# Altium PCB STM32G070_prototype.PcbDoc
Units mm, origin at the board's own origin, x right, y up, seen from the top; angles counter-clockwise.
Board outline 60 x 40 mm, 2 copper layers (Top Layer, Bottom Layer), stack 1.035 mm thick; 91 components, 80 nets, 260 pads, 87 vias.
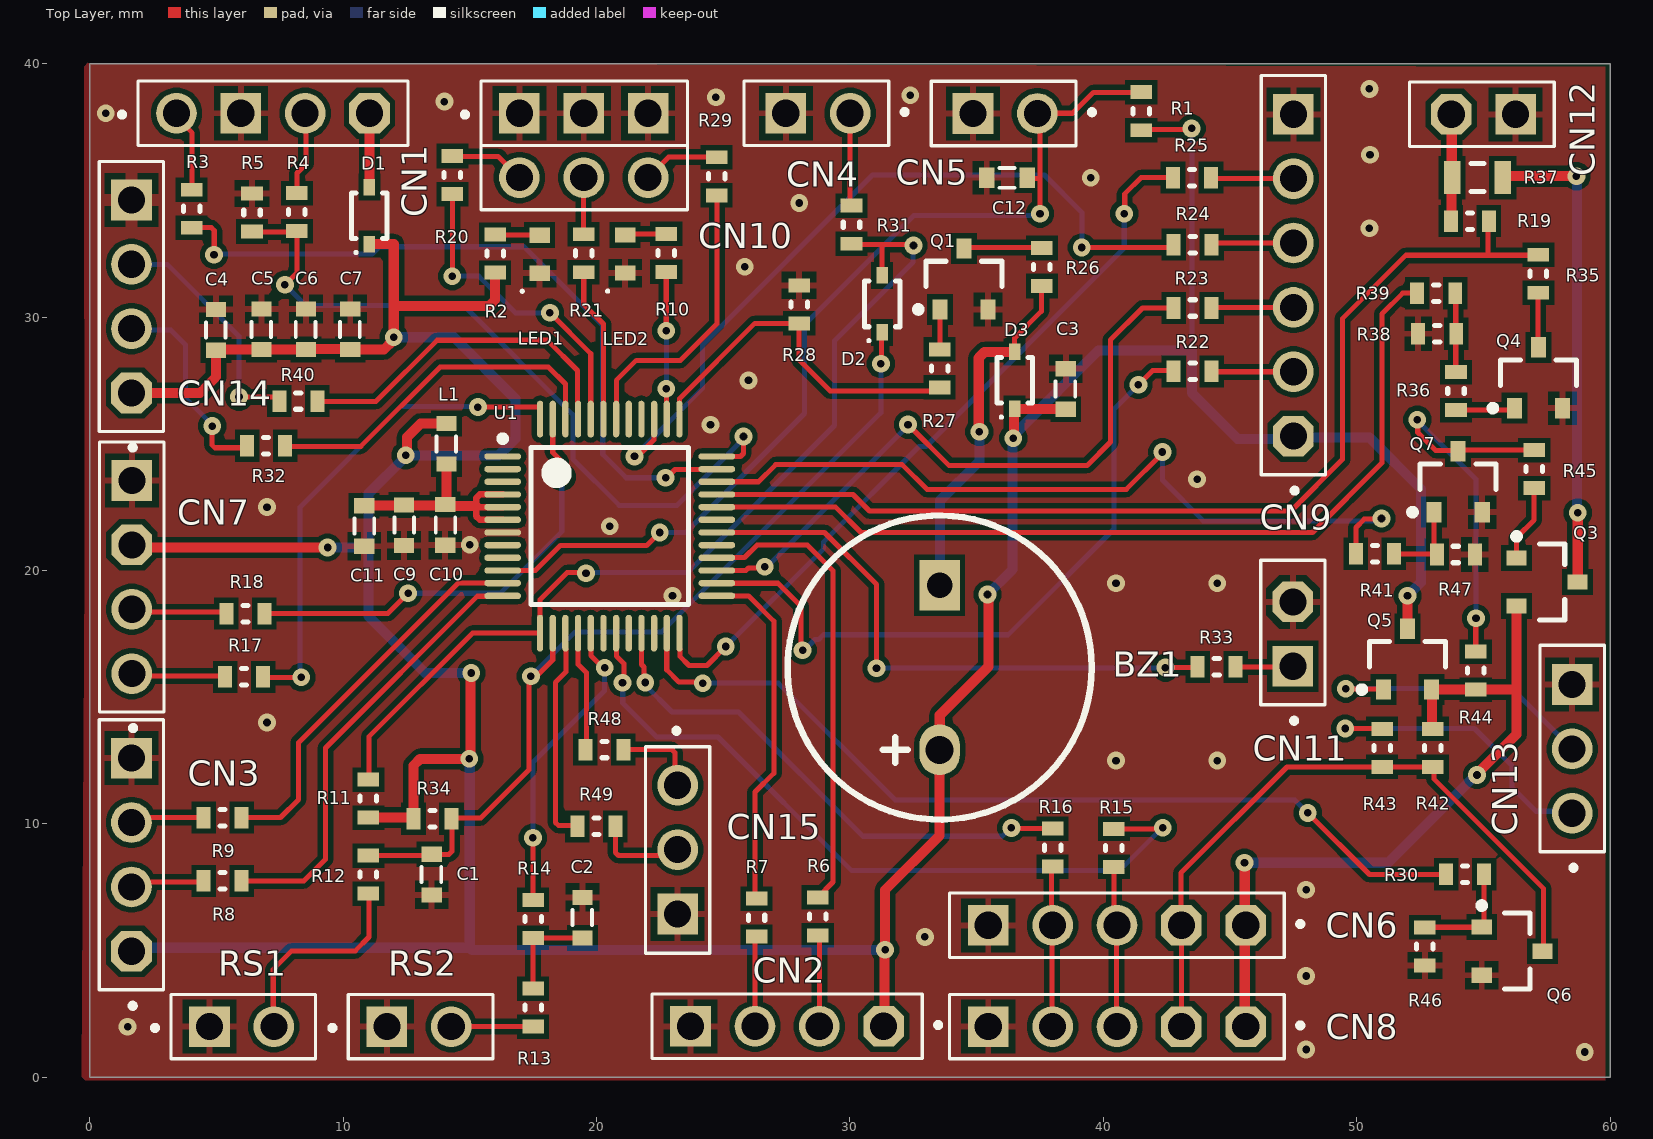
[diagram p0: Top Layer view]
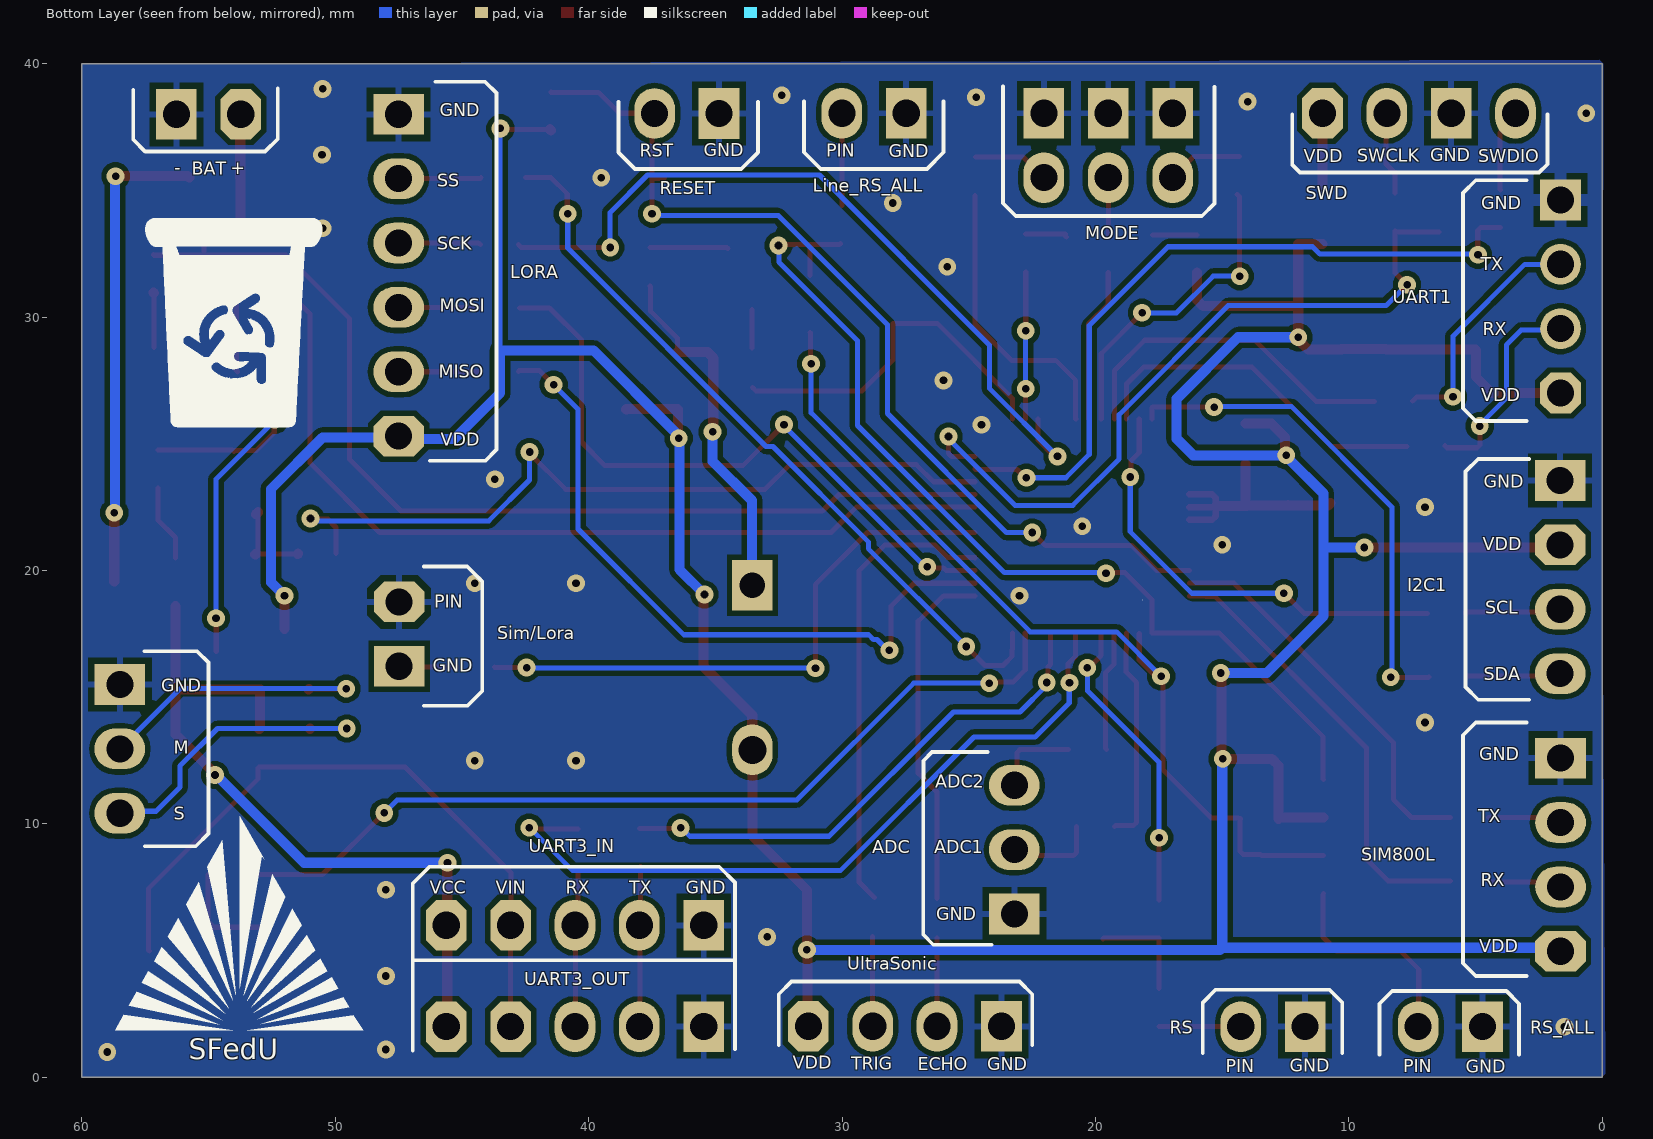
[diagram p1: Bottom Layer view, seen from below]

## Layer stack, top to bottom
Top Solder: solder mask 0.0102, Solder Resist, Dk 3.5
Top Layer: signal copper 0.0175
Dielectric 1: dielectric 1, FR-4, Dk 4.8
Bottom Layer: signal copper 0.0175
Bottom Solder: solder mask 0.0102, Solder Resist, Dk 3.5

## Board outline
0,0 0,40 60,40 60,0

## Design rules (kind name [scope] priority, off if disabled: settings)
Clearance [All] p1: gap=0.2 ignorepadtopadclearanceinfootprint=FALSE except(0: Arc-Hole Track-Hole SMDPad-Hole THPad-Hole Via-Hole Fill-Hole Poly-Hole Region-Hole Text-Hole)
ComponentClearance [All] p1: gap=0.5 collisioncheckmode=3 verticalgap=0.5 showdistances=FALSE
HoleSize [All] p1: absolutevalues=TRUE maxlimit=2.54 minlimit=0.3 maxpercent=80.000 minpercent=20.000
MinimumSolderMaskSliver [All] p1: minsoldermaskwidth=0.15
PolygonConnect PolygonConnect_BIG [IsPad And ( (AsMM(PadXSize_AllLayers)>1) Or (AsMM(PadYSize_AllLayers)>1) )] p1: connectstyle=Relief reliefconductorwidth=0.5 reliefentries=4 polygonreliefangle="90 Angle" airgapwidth=0.254
PolygonConnect PolygonConnect_VIA [IsVia] p2: connectstyle=Direct reliefconductorwidth=0.254 reliefentries=4 polygonreliefangle="90 Angle" airgapwidth=0.254
PolygonConnect [All] p3: connectstyle=Relief reliefconductorwidth=0.254 reliefentries=4 polygonreliefangle="90 Angle" airgapwidth=0.254
RoutingVias [All] p1: holewidth=0.3 width=0.7 viastyle="Through Hole" minholewidth=0.3 minwidth=0.7 maxholewidth=0.3 maxwidth=0.7
SilkToSolderMaskClearance [IsPad] p1: minsilkscreentomaskgap=0.1 clearancetoexposedcopper=TRUE
SolderMaskExpansion SolderMaskExpansion_VIA [IsVia] p1: expansion=0.102 istentingtop=TRUE
SolderMaskExpansion [All] p2: expansion=0.05 istentingtop=FALSE
UnRoutedNet [All] p1: checkbadconnections=TRUE
Width [All] p1: maxlimit=1 minlimit=0.2 preferedwidth=0.2 minimp=50.000000 maximp=50.000000 favimp=50.000000
25 further rules are at their usual default settings.

## Components (designator, comment, footprint, x,y, rotation, side; value= is the part's Value field where it differs from the comment)
BZ1 "BUZZER" BUZZER 33.542,16.17 r90 top
C1 "Capacitor" Cap_0603 13.5,8 r270 top
C2 "Capacitor" Cap_0603 19.45,6.3 r270 top
C3 "Capacitor" Cap_0603 38.519,27.161 r270 top
C4 "" Cap_0603 4.989,29.493 r270 top
C5 "Capacitor" Cap_0603 6.787,29.516 r270 top
C6 "Capacitor" Cap_0603 8.537,29.516 r270 top
C7 "Capacitor" Cap_0603 10.287,29.516 r270 top
C9 "Capacitor" Cap_0603 12.404,21.786 r90 top
C10 "Capacitor" Cap_0603 14.032,21.799 r90 top
C11 "Capacitor" Cap_0603 10.833,21.757 r90 top
C12 "Capacitor" Cap_0603 36.2,35.5 r0 top
CN1 "SWD" PIN_2.54_4_array#1 7.237,38.04 r0 top
CN2 "UltraSonic" PIN_2.54_4_array#2 27.523,2.015 r180 top
CN3 "SIM800L" PIN_2.54_4_array#2 1.651,8.784 r90 top
CN4 "Line_RS_ALL" PIN_2.54_2_ARRAY#1 28.741,38.041 r180 top
CN5 "RESET" PIN_2.54_2_ARRAY#1 36.129,38.033 r180 top
CN6 "UART3_IN" Pin_2.54_5_Array 40.54,6 r180 top
CN7 "I2C1" PIN_2.54_4_array#3 1.666,19.741 r90 top
CN8 "UART3_OUT" Pin_2.54_5_Array 40.54,2 r180 top
CN9 "LORA" Pin_2.54_6_Array 47.5,31.65 r90 top
CN10 "MODE" Pin_2.54_3x2_Array 19.5,36.77 r0 top
CN11 "Sim/Lora" PIN_2.54_2_ARRAY#2 47.479,17.492 r90 top
CN12 "BAT" PIN_2.54_2_ARRAY#2 55,38 r180 top
CN13 "PIN_ARRAY_3" Pin_2.54_3_Array 58.5,12.96 r90 top
CN14 "UART1" PIN_2.54_4_array#4 1.651,30.811 r90 top
CN15 "ADC" Pin_2.54_3_Array 23.204,8.985 r270 top
D1 "D_SCHOTTKY" Diod_Shottky 11.04,34 r90 top
D2 "D_SCHOTTKY" Diod_Shottky 31.275,30.517 r90 top
D3 "D_SCHOTTKY" Diod_Shottky 36.5,27.5 r90 top
L1 "450 mA" Res_0603#1 14.084,24.998 r270 top
LED1 "LED" Led_0603_Red 17.759,32.48 r90 top
LED2 "LED" Led_0603_Red 21.131,32.482 r90 top
Q1 "MOS_N" SOT23-3 34.5,31.5 r90 top
Q3 "MOS_P" SOT23-3 57.506,19.544 r0 top
Q4 "MOS_N" SOT23-3 57.169,27.606 r90 top
Q5 "MOS_P" SOT23-3 52,16.5 r90 top
Q6 "MOS_N" SOT23-3 56.131,4.978 r0 top
Q7 "MOS_N" SOT23-3 54,23.5 r90 top
R1 "10 k" Res_0603#2 41.494,38.121 r270 top
R2 "300 Om" RES_0603 16,32.5 r90 top
R3 "100 Om" RES_0603 4.024,34.273 r270 top
R4 "100 Om" RES_0603 8.182,34.141 r270 top
R5 "100 Om" Res_0603#2 6.409,34.126 r270 top
R6 "100 Om" Res_0603#2 28.729,6.35 r270 top
R7 "100 Om" Res_0603#2 26.316,6.3 r270 top
R8 "100 Om" Res_0603#2 5.25,7.75 r180 top
R9 "100 Om" Res_0603#2 5.25,10.25 r180 top
R10 "300 Om" RES_0603 22.755,32.533 r90 top
R11 "100 k" RES_0603 11,11 r90 top
R12 "300 Om" RES_0603 11,8 r270 top
R13 "300 Om" RES_0603 17.5,2.75 r270 top
R14 "300 Om" RES_0603 17.5,6.25 r90 top
R15 "100 Om" RES_0603 40.416,9.055 r270 top
R16 "100 Om" RES_0603 38,9.061 r270 top
R17 "100 Om" RES_0603 6.1,15.8 r180 top
R18 "100 Om" RES_0603 6.15,18.3 r180 top
R19 "10 k" RES_0603 54.465,33.786 r180 top
R20 "100 Om" RES_0603 14.316,35.603 r270 top
R21 "100 Om" RES_0603 19.493,32.516 r270 top
R22 "100 Om" RES_0603 43.526,27.857 r0 top
R23 "100 Om" RES_0603 43.526,30.357 r0 top
R24 "100 Om" RES_0603 43.526,32.857 r0 top
R25 "100 Om" RES_0603 43.5,35.5 r0 top
R26 "100 Om" RES_0603 37.577,31.975 r90 top
R27 "300 Om" RES_0603 33.539,27.972 r90 top
R28 "51 k" RES_0603 28,30.5 r270 top
R29 "100 Om" RES_0603 24.74,35.554 r270 top
R30 "100 Om" RES_0603 54.274,8.012 r0 top
R31 "100 Om" RES_0603 30.063,33.643 r90 top
R32 "100 Om" RES_0603 6.967,24.922 r180 top
R33 "100 Om" RES_0603 44.474,16.197 r0 top
R34 "50 k" RES_0603 13.53,10.204 r180 top
R35 "10 k" RES_0603 57.167,31.707 r90 top
R36 "300 Om" RES_0603 53.915,27.078 r270 top
R37 "1 Om" Res_0805 54.762,35.501 r0 top
R38 "10 k" RES_0603 53.175,29.339 r0 top
R39 "100 Om" RES_0603 53.135,30.941 r180 top
R40 "100 Om" RES_0603 8.236,26.686 r180 top
R41 "100 Om" RES_0603 50.716,20.662 r180 top
R42 "10 k" RES_0603 53,13 r270 top
R43 "1 k" RES_0603 51,13 r270 top
R44 "10 k" RES_0603 54.696,16.049 r90 top
R45 "1 k" RES_0603 57,24 r90 top
R46 "10 k" RES_0603 52.69,5.166 r90 top
R47 "10 k" RES_0603 53.908,20.63 r0 top
R48 "100 Om" RES_0603 20.315,12.934 r0 top
R49 "100 Om" RES_0603 20,9.9 r0 top
RS1 "RS_ALL" PIN_2.54_2_ARRAY#3 6,2 r0 top
RS2 "RS" PIN_2.54_2_ARRAY#3 13,2 r0 top
U1 "STM32G070" LQFP48 20.525,21.75 r0 top locked

## Footprints (in the part's own frame and the unit in brackets; to place one, negate y for a bottom-side part, rotate by r counter-clockwise, add the part's x,y. Pads: shape width x height; smd on the part's side, far side on the other; paste and mask are expansions set on the pad)
BUZZER [mm]
  oval 2x1.6 hole 1.1: 1(-3.25,0)
  rect 2x1.6 hole 1: 2(3.25,0)
  silkscreen extent -6,-6 6,6, body extent -6,-6 6,6, height 8.5
Cap_0603 [mm] "Chip Capacitor, 2-Leads, Body 1,60x0,80mm, IPC Medium Density"
  rect 0.6x0.8 smd: 1(-0.8,0) 2(0.8,0)
  silkscreen extent -0.3,-0.4 0.3,0.38, body extent -0.8,-0.4 0.8,0.4, height 0.5
Diod_Shottky [mm] "SODFL, 2-Leads, Body 1,25x2,50mm, IPC Medium Density"
  rect 0.65x0.45 smd: 1(-1.125,0) 2(1.125,0)
  silkscreen extent -1.5,-0.7 0.9,0.7, body extent -1.25,-0.67 1.25,0.67, height 1.1
Led_0603_Red [mm]
  rect 0.6x0.8 smd: 1(-0.75,0) 2(0.75,0)
  silkscreen extent -1.51,0.64 -1.41,0.74, body extent -0.85,-0.45 0.85,0.45, height 0.55
LQFP48 [mm] "TSQFP, 48-Leads, Body 7,00x7,00mm, Pitch 0,50mm, IPC Medium Density"
  oval 1.45x0.25 smd: 1(-4.225,2.75) 2(-4.225,2.25) 3(-4.225,1.75) 4(-4.225,1.25) 5(-4.225,0.75) 6(-4.225,0.25) 7(-4.225,-0.25) 8(-4.225,-0.75) 9(-4.225,-1.25) 10(-4.225,-1.75) 11(-4.225,-2.25) 12(-4.225,-2.75) 25(4.225,-2.75) 26(4.225,-2.25) 27(4.225,-1.75) 28(4.225,-1.25) 29(4.225,-0.75) 30(4.225,-0.25) 31(4.225,0.25) 32(4.225,0.75) 33(4.225,1.25) 34(4.225,1.75) 35(4.225,2.25) 36(4.225,2.75)
  oval 0.25x1.45 smd: 13(-2.75,-4.225) 14(-2.25,-4.225) 15(-1.75,-4.225) 16(-1.25,-4.225) 17(-0.75,-4.225) 18(-0.25,-4.225) 19(0.25,-4.225) 20(0.75,-4.225) 21(1.25,-4.225) 22(1.75,-4.225) 23(2.25,-4.225) 24(2.75,-4.225) 37(2.75,4.225) 38(2.25,4.225) 39(1.75,4.225) 40(1.25,4.225) 41(0.75,4.225) 42(0.25,4.225) 43(-0.25,4.225) 44(-0.75,4.225) 45(-1.25,4.225) 46(-1.75,4.225) 47(-2.25,4.225) 48(-2.75,4.225)
  silkscreen extent -4.35,-3.1 3.1,3.57, body extent -4.5,-4.5 4.5,4.5, height 1.6
PIN_2.54_2_ARRAY#1 [mm]
  round 1.605 / inner round 1.605 / far side oval 1.605x2 hole 1.07: 1(-1.27,0)
  rect 1.605x1.605 / inner rect 1.605x1.605 / far side rect 1.605x2 hole 1.07: 2(1.27,0)
  silkscreen extent -3.52,-1.27 2.92,1.27, body extent -2.56,-1.22 2.52,1.32, height 9.5
PIN_2.54_2_ARRAY#2 [mm]
  rect 1.605x1.605 / inner rect 1.605x1.605 / far side rect 1.605x2 hole 1.07: 1(-1.27,0)
  oct 1.605x1.605 / inner oct 1.605x1.605 / far side oct 1.605x2 hole 1.07: 2(1.27,0)
  silkscreen extent -3.52,-1.27 2.92,1.27, body extent -2.56,-1.22 2.52,1.32, height 9.5
PIN_2.54_2_ARRAY#3 [mm]
  rect 1.605x1.605 / inner rect 1.605x1.605 / far side rect 1.605x2 hole 1.07: 1(-1.27,0)
  round 1.605 / inner round 1.605 / far side oval 1.605x2 hole 1.07: 2(1.27,0)
  silkscreen extent -3.52,-1.27 2.92,1.27, body extent -2.56,-1.22 2.52,1.32, height 9.5
Pin_2.54_3_Array [mm]
  round 1.605 / inner round 1.605 / far side oval 1.605x2 hole 1.07: 1(-2.54,0) 2(0,0)
  rect 1.605x1.605 / inner rect 1.605x1.605 / far side rect 1.605x2 hole 1.07: 3(2.54,0)
  silkscreen extent -4.79,-1.27 4.09,1.27, body extent -3.81,-1.27 3.81,1.27, height 9.5
Pin_2.54_3x2_Array [mm]
  rect 1.605x1.605 / inner rect 1.605x1.605 / far side rect 1.605x2 hole 1.07: 1(-2.54,1.27) 2(0,1.27) 3(2.54,1.27)
  round 1.605 / inner round 1.605 / far side oval 1.605x2 hole 1.07: 4(-2.54,-1.27) 5(0,-1.27) 6(2.54,-1.27)
  silkscreen extent -4.79,-2.54 4.09,2.54, body extent -3.81,-2.55 3.81,2.54, height 9.5
PIN_2.54_4_array#1 [mm]
  round 1.605 / inner round 1.605 / far side oval 1.605x2 hole 1.07: 1(-3.81,0) 3(1.27,0)
  rect 1.605x1.605 / inner rect 1.605x1.605 / far side rect 1.605x2 hole 1.07: 2(-1.27,0)
  oct 1.605x1.605 / inner oct 1.605x1.605 / far side oct 1.605x2 hole 1.07: 4(3.81,0)
  silkscreen extent -6.06,-1.27 5.33,1.27, body extent -5.08,-1.27 5.08,1.27, height 9.5
PIN_2.54_4_array#2 [mm]
  oct 1.605x1.605 / inner oct 1.605x1.605 / far side oct 1.605x2 hole 1.07: 1(-3.81,0)
  round 1.605 / inner round 1.605 / far side oval 1.605x2 hole 1.07: 2(-1.27,0) 3(1.27,0)
  rect 1.605x1.605 / inner rect 1.605x1.605 / far side rect 1.605x2 hole 1.07: 4(3.81,0)
  silkscreen extent -6.06,-1.27 5.33,1.27, body extent -5.08,-1.27 5.08,1.27, height 9.5
PIN_2.54_4_array#3 [mm]
  round 1.605 / inner round 1.605 / far side oval 1.605x2 hole 1.07: 1(-3.81,0) 2(-1.27,0)
  oct 1.605x1.605 / inner oct 1.605x1.605 / far side oct 1.605x2 hole 1.07: 3(1.27,0)
  rect 1.605x1.605 / inner rect 1.605x1.605 / far side rect 1.605x2 hole 1.07: 4(3.81,0)
  silkscreen extent -6.06,-1.27 5.33,1.27, body extent -5.08,-1.27 5.08,1.27, height 9.5
PIN_2.54_4_array#4 [mm]
  oct 1.605x1.605 hole 1.07: 1(-3.81,0)
  round 1.605 hole 1.07: 2(-1.27,0) 3(1.27,0)
  rect 1.605x1.605 hole 1.07: 4(3.81,0)
  silkscreen extent -6.06,-1.27 5.33,1.27, body extent -5.08,-1.27 5.08,1.27, height 9.5
Pin_2.54_5_Array [mm]
  oct 1.605x1.605 / inner oct 1.605x1.605 / far side oct 1.605x2 hole 1.07: 1(-5.08,0) 2(-2.54,0)
  round 1.605 / inner round 1.605 / far side oval 1.605x2 hole 1.07: 3(0,0) 4(2.54,0)
  rect 1.605x1.605 / inner rect 1.605x1.605 / far side rect 1.605x2 hole 1.07: 5(5.08,0)
  silkscreen extent -7.33,-1.27 6.61,1.27, body extent -6.35,-1.27 6.35,1.27, height 9.5
Pin_2.54_6_Array [mm]
  oct 1.605x1.605 / inner oct 1.605x1.605 / far side oct 1.605x2 hole 1.07: 1(-6.35,0)
  round 1.605 / inner round 1.605 / far side oval 1.605x2 hole 1.07: 2(-3.81,0) 3(-1.27,0) 4(1.27,0) 5(3.81,0)
  rect 1.605x1.605 / inner rect 1.605x1.605 / far side rect 1.605x2 hole 1.07: 6(6.35,0)
  silkscreen extent -8.6,-1.27 7.88,1.27, body extent -7.62,-1.27 7.62,1.27, height 9.5
Res_0603#1 [mm] "Chip Resistor, 2-Leads, Body 1,60x0,80mm, IPC Medium Density"
  rect 0.6x0.8 smd: 1(-0.8,0) 2(0.8,0)
  silkscreen extent -0.3,-0.4 0.3,0.38, body extent -0.8,-0.4 0.8,0.4, height 0.5
Res_0603#2 [mm] "Chip Resistor, 2-Leads, Body 1,60x0,80mm, IPC Medium Density"
  rect 0.55x0.85 smd: 1(-0.75,0) 2(0.75,0)
  silkscreen extent -0.1,-0.33 0.1,0.33, body extent -0.8,-0.4 0.8,0.4, height 0.45
RES_0603 [mm] "Chip Resistor, 2-Leads, Body 1,60x0,80mm, IPC Medium Density"
  rect 0.55x0.85 smd: 1(-0.75,0) 2(0.75,0)
  silkscreen extent -0.1,-0.33 0.1,0.33, body extent -0.8,-0.4 0.8,0.4, height 0.45
Res_0805 [mm] "Chip Resistor, 2-Leads, Body 2,00x1,25mm, IPC Medium Density"
  rect 0.65x1.3 smd: 1(-1,0) 2(1,0)
  silkscreen extent -0.25,-0.55 0.25,0.55, body extent -1,-0.63 1,0.63, height 0.5
SOT23-3 [mm] "SOT23, 3-Leads, Body 2,92x2,37mm, Pitch 0,95mm, IPC Medium Density"
  rect 0.8x0.6 smd: 1(-1.2,0.95) 2(-1.2,-0.95) 3(1.2,0)
  silkscreen extent -1.32,-1.5 0.7,1.92, body extent -1.32,-1.52 1.32,1.52, height 1.11

## Part data
C1 C2 C3 C5 C6 C7 C9 C10 C11 C12: Voltage=16v
  C1 C2 C3 C6 C7 C11 C12: Сapacity=0.1u
  C5 C9: Сapacity=4.7u
  C10: Сapacity=10u
C4: library part Capacitor, Voltage=16v, Сapacity=10u
CN1 CN2 CN3 CN7 CN14: library part PIN_ARRAY_4
CN4 CN5 CN11 CN12: library part PIN_ARRAY_2
CN6 CN8: library part PIN_ARRAY_5
CN9: library part PIN_ARRAY_6
CN10: library part PIN_ARRAY_3x2
CN15: library part PIN_ARRAY_3
D1 D2 D3: library part Diod_Shottky, Voltage=20v
L1: library part Filter, "BLM18BB221SN1D"
R1 R2 R3 R4 R5 R6 R7 R8 R9 R10 R11 R12 R13 R14 R15 R16 R17 R18 R19 R20 R21 R22 R23 R24 R25 R26 R27 R28 R29 R30 R31 R32 R33 R34 R35 R36 R37 R38 R39 R40 R41 R42 R43 R44 R45 R46 R47 R48 R49: library part Resistor
RS1 RS2: library part Reed_Switch

## Via types
v1: diameter 0.7, hole 0.3, Top Layer to Bottom Layer, tented both sides, 87 vias

## Nets (pads, with @x,y where several pads share a name; then routed paths per layer and width w, separated by ;. In a path a pad name is that pad's centre, name@x,y a point inside that pad or via, vN(x,y) a via of type N, cw(c..) or ccw(c..) an arc to the next point about the centre after c; other vN are vias at no path point)
+3v: CN12.2 R19.2 R37.1 | length 4.5
  Top Layer w0.4: CN12.2@53.54,37.81 CN12.2 53.746,37.984 53.746,35.517 R37.1 53.739,35.478 53.739,33.81 R19.2
ADC1: R49.1 U1.15 | length 8.6
  Top Layer w0.2: U1.15 18.785,17.515 18.785,16.88 18.794,16.871 18.794,15.997 18.377,15.581 18.377,10.059 18.495,9.942 19.208,9.942 R49.1
ADC2: R48.1 U1.16 | length 4.7
  Top Layer w0.2: U1.16 19.28,17.52 19.28,16.292 19.601,15.971 19.601,12.97 R48.1
BAT_LEVEL: R19.1 R35.2 U1.33 | length 41.5
  Top Layer w0.2: U1.33@24.756,22.994 30.126,22.994 30.769,22.35 47.406,22.35 49.431,24.375 49.431,29.931 51.937,32.437 54.956,32.437 ; 54.956,32.435 54.956,32.437 ; R19.1 55.173,33.745 55.173,32.437 ; R35.2 57.146,32.437 55.173,32.437 ; 54.956,32.437 55.173,32.437
BUZZER: R27.1 R28.2 U1.37 | length 14.3
  Top Layer w0.2: U1.37@23.276,25.976 23.276,26.776 26.25,29.75 R28.2 28,28.301 29.214,27.087 33.404,27.087 R27.1
CALIB: R14.2 U1.17 | length 12
  Top Layer w0.2: v1(17.493,9.452) 17.493,7.007 R14.2 ; U1.17 19.785,17.515 19.785,16.638 20.259,16.163 v1(20.327,16.163)
  Bottom Layer w0.2: v1(17.493,9.452) 17.493,12.433 20.314,15.255 20.314,16.15 v1(20.327,16.163)
COMMON_LINE: D2.2 R11.2 R31.1 U1.13 | length 38
  Top Layer w0.2: R11.2 11.02,11.77 11.02,13.44 15.106,17.525 U1.13 ; U1.13 17.774,18.849 18.839,19.914 19.569,19.914 v1(19.588,19.895) ; R31.1 30.1,32.856 31.275,32.856 ; D2.2 31.275,32.856 ; v1(32.511,32.824) 32.48,32.856 31.275,32.856
  Bottom Layer w0.2: v1(19.588,19.895) 19.608,19.914 23.588,19.914 29.392,25.718 29.392,29.069 32.497,32.174 32.497,32.81 v1(32.511,32.824)
Door: C1.1 D2.1 R12.1 R34.1 U1.14 | length 35.7
  Top Layer w0.2: R12.1 13.45,8.75 C1.1 14.186,8.8 14.303,8.917 R34.1@14.303,10.181 ; R34.1 R34.1@14.303,10.181 ; U1.14@18.275,17.51 18.275,16.467 17.731,15.924 17.51,15.924 17.336,15.75 17.336,12.132 15.442,10.238 14.359,10.238 R34.1@14.303,10.181 ; v1(31.223,28.158) 31.249,28.183 31.249,29.367 D2.1
  Bottom Layer w0.2: v1(17.415,15.828) 19.165,17.578 22.578,17.578 31.223,26.223 v1@31.223,28.157
ECHO: R7.1 U1.25 | length 13.9
  Top Layer w0.2: U1.25 26,19 27,18 27,12 26.258,11.258 R7.1@26.258,7.05
GND: C1.2 C2.1 C3.1 C4.1 C5.1 C6.1 C7.1 C9.1 C10.1 C11.1 C12.1 CN1.2 CN2.4 CN3.4 CN4.2 CN5.2 CN6.5 CN7.4 CN8.5 CN9.6 CN10.1 CN10.2 CN10.3 CN11.2 CN12.1 CN13.3 CN14.4 CN15.3 LED1.1 LED2.1 Q1.2 Q4.2 Q6.2 Q7.2 R5.1 R28.1 R38.1 R46.1 R47.2 RS1.1 RS2.1 U1.7 | length 0
  Top Layer w0.2: RS1.1 RS1.1@4.75,1.98
  other v1: 59,1 48,1.1 1.5,2 48,4 32.96,5.54 48,7.4 40.5,12.5 44.5,12.5 7,14 23,19 40.5,19.5 44.5,19.5 15,21.013 20.525,21.75 7,22.5 43.7,23.6 24.5,25.75 26,27.5 25.852,31.985 50.5,33.5 28,34.5 39.5,35.5 50.523,36.408 0.636,38.041 14,38.5 24.715,38.673 32.383,38.756 50.5,39
I2C1_SCL: R18.1 U1.47 | length 17.7
  Top Layer w0.2: R18.1 11.766,18.3 v1(12.568,19.101) ; U1.47 18.275,24.659 18.594,24.34 18.594,23.726 v1(18.63,23.69)
  Bottom Layer w0.2: v1(12.568,19.101) 16.201,19.101 18.63,21.53 v1(18.63,23.69)
I2C1_SDA: R17.1 U1.48 | length 19.8
  Top Layer w0.2: R17.1 6.865,15.785 v1(8.355,15.785) ; v1(15.324,26.447) 17.752,26.447 17.775,26.424 U1.48
  Bottom Layer w0.2: v1(8.355,15.785) 8.3,15.84 8.3,22.5 12.275,26.475 15.296,26.475 v1(15.324,26.447)
"KEY 1": R36.1 R38.2 R39.1 | length 3.1
  Top Layer w0.2: R36.1@53.853,27.842 53.907,27.896 53.907,29.321 R38.2 ; R38.2@53.905,29.359 R39.1@53.905,30.921
  Top Layer w0.4: R39.1 R39.1@53.905,30.921 ; R38.2@53.905,29.359 R38.2
"KEY 2": Q7.1 R41.1 R47.1 | length 3.4
  Top Layer w0.2: R41.1@51.482,20.646 53.046,20.646 R47.1@53.142,20.646 ; R47.1@53.046,20.742 Q7.1@53.046,22.296
  Top Layer w0.4: R41.1 R41.1@51.482,20.646 ; Q7.1 Q7.1@53.132,22.218 ; R47.1@53.142,20.646 R47.1
"KEY 3": R30.1 U1.23 | length 35.5
  Top Layer w0.2: U1.23 22.775,16.078 23.252,15.602 24.143,15.602 v1(24.19,15.555) ; v1(48.065,10.435) 50.5,8 R30.1@53.474,8
  Bottom Layer w0.2: v1(24.19,15.555) 27.174,15.555 31.785,10.944 47.556,10.944 v1(48.065,10.435)
MODE1: R20.2 U1.44 | length 12.6
  Top Layer w0.2: v1(14.314,31.613) 14.314,34.748 R20.2@14.408,34.842 ; v1(18.163,30.166) 19.775,28.554 U1.44
  Bottom Layer w0.2: v1(14.314,31.613) 15.356,31.613 16.803,30.166 v1(18.163,30.166)
MODE2: R21.2 U1.43 | length 6.1
  Top Layer w0.2: R21.2@19.5,31.75 19.5,30.498 20.275,29.723 U1.43
MODE3: R29.2 U1.42 | length 11.5
  Top Layer w0.2: U1.42 20.785,25.985 20.785,27.501 21.574,28.291 23.314,28.291 24.751,29.728 R29.2@24.751,34.792
NetBZ1_2: BZ1.2 D3.2 R26.1 | length 13.8
  Top Layer w0.2: BZ1.2 BZ1.2@33.575,19.453 ; D3.2 36.5,29.175 37.552,30.227 37.552,31.2 R26.1
  Top Layer w0.4: v1(35.111,25.472) 35.086,25.497 35.086,28.391 35.32,28.625 D3.2
  Bottom Layer w0.4: BZ1.2@33.5,19.856 33.551,19.906 33.551,22.752 35.111,24.312 v1(35.111,25.472)
NetC2_2: C2.2 R13.1 R14.1 | length 4.2
  Top Layer w0.2: R13.1 R14.1 19.675,5.5 C2.2@19.708,5.468
NetCN1_4: CN1.4 D1.2 | length 2.4
  Top Layer w0.2: CN1.4@11.04,37.46 CN1.4@11.06,37.48 ; CN1.4@11.04,37.5 CN1.4@11.06,37.48 ; CN1.4@11.07,37.47 CN1.4@11.06,37.48 ; CN1.4@11.08,37.5 CN1.4@11.06,37.48
  Top Layer w0.4: D1.2 CN1.4@11.04,37.46
NetCN2_2: CN2.2 R6.2 | length 3.5
  Top Layer w0.2: CN2.2 R6.2@28.793,5.553
NetCN2_3: CN2.3 R7.2 | length 3.5
  Top Layer w0.2: CN2.3 R7.2@26.253,5.5
NetCN3_2: CN3.2 R8.2 | length 2.9
  Top Layer w0.2: CN3.2@1.651,7.71 4.46,7.71 R8.2
NetCN3_3: CN3.3 R9.2 | length 2.8
  Top Layer w0.2: CN3.3@1.651,10.25 R9.2
NetCN4_1: CN4.1 R31.2 | length 3.6
  Top Layer w0.2: R31.2@30.011,34.393 CN4.1
NetCN6_3: CN6.3 CN8.3 R15.2 | length 6.3
  Top Layer w0.2: R15.2@40.416,8.255 40.416,6.104 40.52,6 40.52,2.02 CN8.3
NetCN6_4: CN6.4 CN8.4 R16.2 | length 6.1
  Top Layer w0.2: CN6.4@37.96,5.5 37.98,5.48 37.98,2.02 CN8.4 ; R16.2@37.96,8.311 37.96,6.04 CN6.4
  Top Layer w0.4: CN8.4@37.619,1.968 CN8.4@37.819,2.168
NetCN7_1: CN7.1 R17.2 | length 3.7
  Top Layer w0.2: CN7.1@1.666,15.828 5.322,15.828 R17.2
NetCN7_2: CN7.2 R18.2 | length 3.8
  Top Layer w0.2: CN7.2@1.666,18.368 5.332,18.368 R18.2
NetCN9_2: CN9.2 R22.2 | length 3.2
  Top Layer w0.2: R22.2 44.292,27.84 CN9.2
NetCN9_3: CN9.3 R23.2 | length 3.2
  Top Layer w0.2: R23.2 44.299,30.38 CN9.3
NetCN9_4: CN9.4 R24.2 | length 3.3
  Top Layer w0.2: R24.2 44.339,32.92 CN9.4
NetCN9_5: CN9.5 R25.2 | length 3.3
  Top Layer w0.2: R25.2 44.29,35.46 CN9.5
NetCN10_4: CN10.4 R20.1 | length 3.3
  Top Layer w0.2: R20.1@14.316,36.342 16.118,36.342 CN10.4 CN10.4@16.64,35.5
NetCN10_5: CN10.5 R21.1 | length 2.2
  Top Layer w0.2: R21.1 CN10.5@19.493,35.493
NetCN10_6: CN10.6 R29.1 | length 3
  Top Layer w0.2: CN10.6 22.85,36.31 R29.1@24.733,36.31
NetCN11_1: CN11.1 R33.2 | length 2.3
  Top Layer w0.2: R33.2 47.467,16.197 CN11.1@47.5,16.23
NetCN13_1: CN13.1 R43.1 | length 12.4
  Top Layer w0.2: v1@49.55,13.757 R43.1@50.993,13.757
  Top Layer w0.4: v1(49.543,13.764) v1@49.55,13.757 ; R43.1@50.993,13.757 R43.1 ; CN13.1@58.454,10.374 CN13.1
  Bottom Layer w0.2: v1(49.543,13.764) 54.65,13.764 56.121,12.292 56.121,11.451 57.072,10.5 58.42,10.5 CN13.1
NetCN13_2: CN13.2 Q5.1 | length 11.4
  Top Layer w0.2: v1@49.585,15.318 Q5.1@51.032,15.318
  Top Layer w0.4: v1(49.567,15.336) v1@49.585,15.318 ; Q5.1@51.032,15.318 Q5.1
  Bottom Layer w0.2: v1(49.567,15.336) 56.124,15.336 CN13.2
NetCN14_2: CN14.2 R32.2 | length 8.3
  Top Layer w0.2: v1(4.84,25.697) 4.823,25.68 4.823,24.961 4.941,24.844 6.139,24.844 R32.2
  Bottom Layer w0.2: CN14.2 1.706,29.486 3.204,29.486 3.793,28.897 3.793,26.796 4.84,25.749 v1(4.84,25.697)
NetCN14_3: CN14.3 R40.2 | length 9.6
  Top Layer w0.2: CN14.3 CN14.3@1.773,31.96 ; v1(5.895,26.851) 7.322,26.851 R40.2
  Bottom Layer w0.2: CN14.3 3.061,32.081 5.895,29.247 v1(5.895,26.851)
NetCN15_1: CN15.1 R48.2 | length 3.4
  Top Layer w0.2: R48.2 22.977,12.934 23.094,12.817 23.094,11.635 CN15.1
NetCN15_2: CN15.2 R49.2 | length 3.6
  Top Layer w0.2: R49.2 20.75,8.867 20.867,8.75 22.969,8.75 CN15.2
NetLED1_2: LED1.2 R2.2 | length 1.8
  Top Layer w0.2: R2.2@16.007,33.243 LED1.2@17.759,33.243
NetLED2_2: LED2.2 R10.2 | length 1.6
  Top Layer w0.2: LED2.2@21.143,33.153 LED2.2@21.203,33.213 ; LED2.2@21.194,33.283 R10.2
NetQ1_1: Q1.1 R27.2 | length 1.5
  Top Layer w0.2: R27.2@33.55,28.786 Q1.1
NetQ1_3: Q1.3 R26.2 | length 3.1
  Top Layer w0.2: Q1.3 34.55,32.75 R26.2@37.577,32.75
NetQ3_1: Q3.1 R45.1 | length 3
  Top Layer w0.2: Q3.1 56.306,21.297 57,21.991 R45.1
NetQ3_3: Q3.3 R37.2 | length 18.9
  Top Layer w0.4: R37.2 55.82,35.558 v1(58.667,35.558) ; Q3.3@58.721,19.56 v1(58.721,22.279)
  Bottom Layer w0.4: v1(58.667,35.558) 58.694,35.531 58.694,22.306 v1(58.721,22.279)
NetQ4_1: Q4.1 R36.2 | length 2.3
  Top Layer w0.2: R36.2 56.14,26.328 Q4.1
NetQ4_3: Q4.3 R35.1 | length 2.2
  Top Layer w0.2: Q4.3@57.151,28.806 R35.1@57.151,30.942
  Top Layer w0.4: R35.1@57.151,30.942 R35.1
NetQ6_1: Q6.1 R30.2 R46.2 | length 4.4
  Top Layer w0.2: R46.2@52.696,5.922 Q6.1@54.925,5.922 ; Q6.1@55.02,6.017 R30.2@55.02,8.008
  Top Layer w0.4: R46.2 R46.2@52.696,5.922 ; Q6.1@54.925,5.922 Q6.1 Q6.1@55.02,6.017
NetQ7_3: Q7.3 R44.2 R45.2 | length 15.5
  Top Layer w0.2: v1(52.391,25.95) 52.407,25.933 52.407,25.447 53.116,24.738 53.962,24.738 Q7.3 54.05,24.75 R45.2 ; R44.2 54.696,18.111 v1(54.705,18.119)
  Bottom Layer w0.2: v1(52.391,25.95) 52.391,25.913 54.705,23.599 v1(54.705,18.119)
NetR3_2: R3.2 U1.35 | length 28.8
  Top Layer w0.2: R3.2@4.028,33.528 4.803,33.528 4.921,33.411 4.921,32.465 v1(4.909,32.453) ; v1(22.729,23.66) 22.77,23.66 23.096,23.985 24.1,23.985 24.105,23.99 24.74,23.99 U1.35
  Bottom Layer w0.2: v1(4.909,32.453) 4.937,32.481 11.143,32.481 11.437,32.775 17.138,32.775 20.25,29.663 20.25,24.585 21.175,23.66 v1(22.729,23.66)
NetR4_2: R4.2 R5.2 U1.36 | length 29.7
  Top Layer w0.2: R5.2@6.453,33.36 8.15,33.36 R4.2 ; v1(7.709,31.275) 8.182,31.748 R4.2@8.182,33.316 ; U1.36 25.687,24.5 25.804,24.617 v1(25.803,25.287)
  Bottom Layer w0.2: v1(7.709,31.275) 8.533,30.451 14.764,30.451 19.068,26.147 19.068,24.399 20.895,22.571 23.18,22.571 25.803,25.194 v1(25.803,25.287)
NetR12_2: R12.2 RS1.2 | length 8.3
  Top Layer w0.2: RS1.2 7.247,2.023 7.247,4.264 7.974,4.991 10.486,4.991 11.03,5.535 11.03,7.22 R12.2
NetR13_2: R13.2 RS2.2 | length 3.2
  Top Layer w0.2: RS2.2 R13.2
NetR39_2: R39.2 U1.32 | length 35.4
  Top Layer w0.2: U1.32 29.44,22.5 30.441,21.499 48.253,21.499 51,24.245 51,30.126 51.814,30.941 R39.2
NetR41_2: R41.2 U1.34 | length 31.6
  Top Layer w0.2: U1.34 26.394,23.5 27.071,24.177 32.065,24.177 33.041,23.2 40.91,23.2 42.33,24.621 v1(42.33,24.674) ; R41.2 49.966,21.696 50.293,22.023 50.948,22.023 v1(50.976,22.051)
  Bottom Layer w0.2: v1(42.33,24.674) 42.33,23.569 43.939,21.96 50.886,21.96 v1(50.976,22.051)
NRST: C12.2 CN5.1 R1.1 U1.10 | length 37.4
  Top Layer w0.2: U1.10 17.59,20 18.573,20.983 21.983,20.983 v1(22.5,21.5) ; C12.2 37.03,35.47 37.502,35.47 ; CN5.1@37.442,38.04 38.785,38.04 39.612,38.867 41.49,38.867 R1.1 ; CN5.1@37.5,37.48 37.502,37.478 37.502,35.47 ; v1(37.502,34.078) 37.502,35.47
  Bottom Layer w0.2: v1(22.5,21.5) 23.521,21.5 28.211,26.191 28.211,29.701 32.511,34 37.423,34 v1(37.502,34.078)
S/L: R33.1 U1.30 | length 23.2
  Top Layer w0.2: U1.30 29,21.5 31.048,19.452 v1(31.048,16.144) ; v1(42.45,16.169) 43.695,16.169 R33.1
  Bottom Layer w0.2: v1(31.048,16.144) 31.061,16.156 42.438,16.156 v1(42.45,16.169)
SPI2_MISO: R22.1 U1.26 | length 27.5
  Top Layer w0.2: U1.26 24.753,19.497 27.167,19.497 28.071,18.593 28.071,16.915 v1(28.133,16.853) ; v1(41.383,27.331) 41.947,27.894 42.738,27.894 R22.1
  Bottom Layer w0.2: v1(28.133,16.853) 28.2,16.853 28.626,17.279 28.767,17.279 28.952,17.464 36.244,17.464 40.419,21.639 40.419,26.367 v1(41.383,27.331)
SPI2_MOSI: R23.1 U1.27 | length 26
  Top Layer w0.2: U1.27 25.895,20.001 25.995,20.101 26.596,20.101 v1(26.645,20.15) ; v1(32.294,25.756) 33.916,24.134 39.353,24.134 40.286,25.067 40.286,29.099 41.544,30.357 R23.1@42.726,30.357
  Bottom Layer w0.2: v1(26.645,20.15) 26.733,20.15 32.294,25.711 v1(32.294,25.756)
SPI2_SCK: R24.1 U1.39 | length 30.8
  Top Layer w0.2: v1(21.5,24.5) 21.619,24.5 22.275,25.156 U1.39 ; v1(39.153,32.743) 42.662,32.743 R24.1
  Bottom Layer w0.2: v1(21.5,24.5) 24.19,27.19 24.19,28.9 30.895,35.606 37.676,35.606 39.153,34.129 v1(39.153,32.743)
SPI2_SS: R25.1 U1.24 | length 29.6
  Top Layer w0.2: U1.24 23.285,17.515 23.285,16.88 23.291,16.873 23.291,16.613 23.654,16.251 24.358,16.251 v1(25.106,16.999) ; v1(40.826,34.078) 40.844,34.097 40.844,34.86 41.493,35.508 R25.1@42.492,35.508
  Bottom Layer w0.2: v1(25.106,16.999) 28.966,20.859 28.966,21.13 32.73,24.894 33,24.894 40.826,32.72 v1(40.826,34.078)
SWCLK: CN1.3 R4.1 | length 3.3
  Top Layer w0.2: R4.1 8.182,35.682 8.54,36.04 CN1.3@8.54,38.04
SWDIO: CN1.1 R3.1 | length 3.3
  Top Layer w0.2: CN1.1 3.427,37.891 4.049,37.269 4.049,35.048 R3.1
TRIG: R6.1 U1.28 | length 18.3
  Top Layer w0.2: U1.28 24.76,20.51 25.845,20.51 26.336,21 28.325,21 29.333,19.991 29.333,7.704 R6.1
UART1_RX: R32.1 U1.46 | length 14
  Top Layer w0.2: R32.1@7.717,24.9 10.7,24.9 13.823,28.023 18.106,28.023 18.775,27.354 U1.46
UART1_TX: R40.1 U1.45 | length 13.7
  Top Layer w0.2: R40.1@8.986,26.664 11.295,26.664 13.714,29.083 18.062,29.083 19.25,27.895 U1.45@19.25,25.975
UART3_RX: R15.1 U1.19 | length 29.6
  Top Layer w0.2: U1.19 20.785,17.515 20.785,16.626 21.086,16.324 21.086,15.625 v1(21.028,15.566) ; R15.1 42.303,9.805 v1(42.346,9.849)
  Bottom Layer w0.2: v1@21.037,15.557 21.037,14.769 22.381,13.425 24.798,13.425 30.056,8.167 40.643,8.167 42.325,9.849 v1(42.346,9.849)
UART3_TX: R16.1 U1.21 | length 21
  Top Layer w0.2: U1.21 21.775,16.294 21.875,16.194 21.875,15.631 v1(21.928,15.579) ; v1(36.374,9.843) v1@36.374,9.811 ; R16.1 v1@36.374,9.811 ; v1@36.374,9.811 36.324,9.811 36.374,9.761 v1@36.374,9.811
  Bottom Layer w0.2: v1(21.928,15.579) 21.928,15.47 22.978,14.42 25.607,14.42 30.513,9.513 36.007,9.513 36.337,9.843 v1(36.374,9.843)
UART4_RX: R8.1 U1.12 | length 17.5
  Top Layer w0.2: R8.1 8.455,7.75 9.306,8.601 9.306,12.991 15.299,18.984 15.648,18.984 15.655,18.99 16.29,18.99 U1.12
UART4_TX: R9.1 U1.11 | length 15.4
  Top Layer w0.2: R9.1 7.535,10.25 8.25,10.965 8.25,13.215 14.533,19.498 16.298,19.498 U1.11
USER_LED: R10.1 U1.38 | length 5.8
  Top Layer w0.2: v1(22.756,27.166) 22.766,27.157 22.766,25.984 U1.38 ; v1(22.755,29.458) R10.1
  Bottom Layer w0.2: v1(22.756,27.166) 22.756,29.44 v1@22.765,29.449
VCC: CN6.1 CN8.1 Q3.2 Q5.2 R42.1 R44.1 | length 29.3
  Top Layer w0.4: v1@45.58,8.466 45.58,2.04 CN8.1 ; Q5.2 Q5.2@52.951,15.299 ; R42.1 52.975,13.775 52.975,15.275 Q5.2@52.951,15.299 ; v1(54.744,11.929) 54.744,11.979 56.306,13.541 56.306,15.306 ; Q3.2 56.306,15.306 ; Q5.2@52.951,15.299 R44.1 56.299,15.299 56.306,15.306
  Bottom Layer w0.4: v1(45.57,8.466) 51.231,8.466 54.694,11.929 v1(54.744,11.929)
VDD: BZ1.1 C3.2 C4.2 C5.2 C6.2 C7.2 CN2.1 CN3.1 CN7.3 CN9.1 CN14.1 D1.1 D3.1 L1.1 Q5.3 R1.2 R2.1 R11.1 R34.2 | length 170.3
  Top Layer w0.2: R1.2@41.53,37.407 v1@43.446,37.407
  Top Layer w0.4: CN14.1 4.357,27.001 4.989,27.633 C4.2 ; CN7.3@1.681,20.908 v1(9.392,20.908) ; C4.2@5.013,28.718 C5.2@6.785,28.718 ; C5.2@6.788,28.718 C6.2@8.535,28.718 ; C6.2@8.559,28.739 C7.2@10.287,28.739 ; C7.2@10.289,28.719 11.616,28.719 11.943,29.046 11.943,29.143 v1(12,29.2) 12,30.436 ; R11.1 12.734,10.25 R34.2 12.78,12.306 13.042,12.568 v1(14.985,12.568) 15.03,12.613 15.03,15.926 v1(15.059,15.955) ; D1.1 12,32.875 ; 12.003,32.775 12.003,30.751 12,30.751 12,30.436 ; v1(12.471,24.543) 12.529,24.601 12.529,25.264 13.064,25.799 L1.1@14.083,25.799 ; R2.1 16,30.67 15.766,30.436 12,30.436 ; CN2.1 31.361,2.042 31.361,5.002 v1(31.389,5.03) 31.389,7.392 33.542,9.545 BZ1.1 33.545,12.923 33.545,14.286 35.475,16.216 35.475,19.005 v1(35.429,19.051) ; v1(36.449,25.214) 36.475,25.241 36.475,26.35 D3.1 ; D3.1@36.502,26.373 36.507,26.368 38.512,26.368 C3.2 ; R1.2 R1.2@41.53,37.407 ; v1@43.446,37.407 v1(43.482,37.443) ; CN9.1@47.481,25.281 CN9.1 ; Q5.3 v1(52,19)
  Bottom Layer w0.2: 43.493,28.685 v1@43.493,37.432
  Bottom Layer w0.4: CN3.1 1.789,5.112 15.001,5.112 15.083,5.03 v1(31.389,5.03) ; CN7.3@1.681,20.908 CN7.3@1.699,20.926 ; v1(9.392,20.908) 10.982,20.908 11,20.926 ; v1(12,29.2) 14.376,29.2 16.8,26.776 16.8,25.2 16.143,24.543 v1(12.471,24.543) 12.471,24.5 11,23.028 11,20.926 ; 15.001,5.156 v1@15.001,12.552 ; v1(15.059,15.955) 13.245,15.955 11,18.2 11,20.926 ; BZ1.1 BZ1.1@33.623,13.001 ; v1(35.429,19.051) 36.413,20.035 v1@36.413,25.179 ; v1(36.449,25.214) 36.449,25.295 36.599,25.445 36.599,25.476 39.808,28.685 43.493,28.685 43.493,26.999 45.305,25.187 47.387,25.187 CN9.1 47.558,25.242 50.508,25.242 52.537,23.213 52.537,19.537 v1(52,19)
VDD/VDDA: C9.2 C10.2 C11.2 L1.2 U1.4 U1.5 U1.6 | length 10.2
  Top Layer w0.254: U1.6 15.399,22 15.25,22.149 15.25,22.5 ; U1.5 15.25,22.5 ; U1.4 15.399,23 15.25,22.851 15.25,22.55 15.25,22.5
  Top Layer w0.4: C11.2@10.733,22.657 C11.2 12.375,22.557 C9.2 12.432,22.557 13.99,22.557 C10.2 14.079,22.646 L1.2@14.079,24.198 ; C10.2@14.055,22.55 15.25,22.55
VIN: CN6.2 CN8.2 Q6.3 R42.2 R43.2 | length 26.9
  Top Layer w0.2: CN8.2 43.08,5.96 CN6.2@43.12,6 ; CN6.2 43.06,6.02 43.06,8.06 47.25,12.25 R43.2 R42.2 53.04,12.21 53.04,11.782 57.376,7.446 57.376,5.023 Q6.3
pads on no net: U1.1 U1.2 U1.3 U1.8 U1.9 U1.18 U1.20 U1.22 U1.29 U1.31 U1.40 U1.41

## Polygon pours and split planes (outlines as drawn)
GND on Bottom Layer "GND_L02_P001" (solid, remove dead copper, pour order 1): 0,20.076 -0.025,40.025 0.1,40.15 60,40 60,19.5 60,0 -0.118,0
GND on Top Layer "GND_L01_P000" (solid, remove dead copper, pour order 0): -0.189,19.958 -0.214,39.907 -0.089,40.032 59.811,39.882 59.811,19.958 59.811,-0.118 -0.308,-0.118

## Silkscreen, mask and mechanical layers (free items; w line width, h text height)
Bottom Overlay:
  drawing of 105 lines, arcs and shapes, not listed
  text "GND" at 45.88,37.921 h0.5
  text "GND" at 35.468,36.343 h0.5
  text "GND" at 28.165,36.312 h0.5
  text "PIN" at 30.631,36.32 h0.5
  text "RST" at 37.976,36.328 h0.5
  text "GND" at 6.786,36.141 h0.5
  text "SWCLK" at 9.672,36.134 h0.5
  text "SWDIO" at 4.898,36.114 h0.5
  text "VDD" at 11.783,36.114 h0.5
  text "-" at 56.1,35.659 h0.5
  text "+" at 53.554,35.635 h0.5
  text "SS" at 45.983,35.15 h0.5
  text "GND" at 4.783,34.258 h0.5
  text "SCK" at 45.983,32.65 h0.5
  text "TX" at 4.806,31.841 h0.5
  text "MOSI" at 45.879,30.199 h0.5
  text "RX" at 4.724,29.285 h0.5
  text "MISO" at 45.925,27.61 h0.5
  text "VDD" at 4.782,26.677 h0.5
  text "VDD" at 45.827,24.914 h0.5
  text "GND" at 4.683,23.258 h0.5
  text "VDD" at 4.716,20.8 h0.5
  text "PIN" at 46.101,18.531 h0.5
  text "SCL" at 4.624,18.285 h0.5
  text "GND" at 46.161,16 h0.5
  text "SDA" at 4.682,15.677 h0.5
  text "GND" at 56.866,15.223 h0.5
  text "M" at 56.371,12.771 h0.5
  text "GND" at 4.858,12.515 h0.5
  text "ADC2" at 26.333,11.426 h0.5
  text "S" at 56.371,10.164 h0.5
  text "TX" at 4.891,10.057 h0.5
  text "ADC1" at 26.36,8.84 h0.5
  text "RX" at 4.799,7.542 h0.5
  text "RX" at 40.902,7.251 h0.5
  text "GND" at 36.161,7.239 h0.5
  text "TX" at 38.395,7.238 h0.5
  text "VIN" at 43.662,7.238 h0.5
  text "VCC" at 46.265,7.238 h0.5
  text "GND" at 26.283,6.202 h0.5
  text "VDD" at 4.857,4.935 h0.5
  text "SFedU" at 55.784,0.716 h0.8
  text "VDD" at 31.94,0.339 h0.5
  text "GND" at 24.272,0.287 h0.5
  text "ECHO" at 27.015,0.287 h0.5
  text "TRIG" at 29.642,0.295 h0.5
  text "GND" at 12.334,0.216 h0.5
  text "PIN" at 7.856,0.202 h0.5
  text "PIN" at 14.87,0.197 h0.5
  text "GND" at 5.391,0.174 h0.5
Body:
  the board outline again, w0.2